# EAGLE board RelayBoard (EAGLE 4.13)
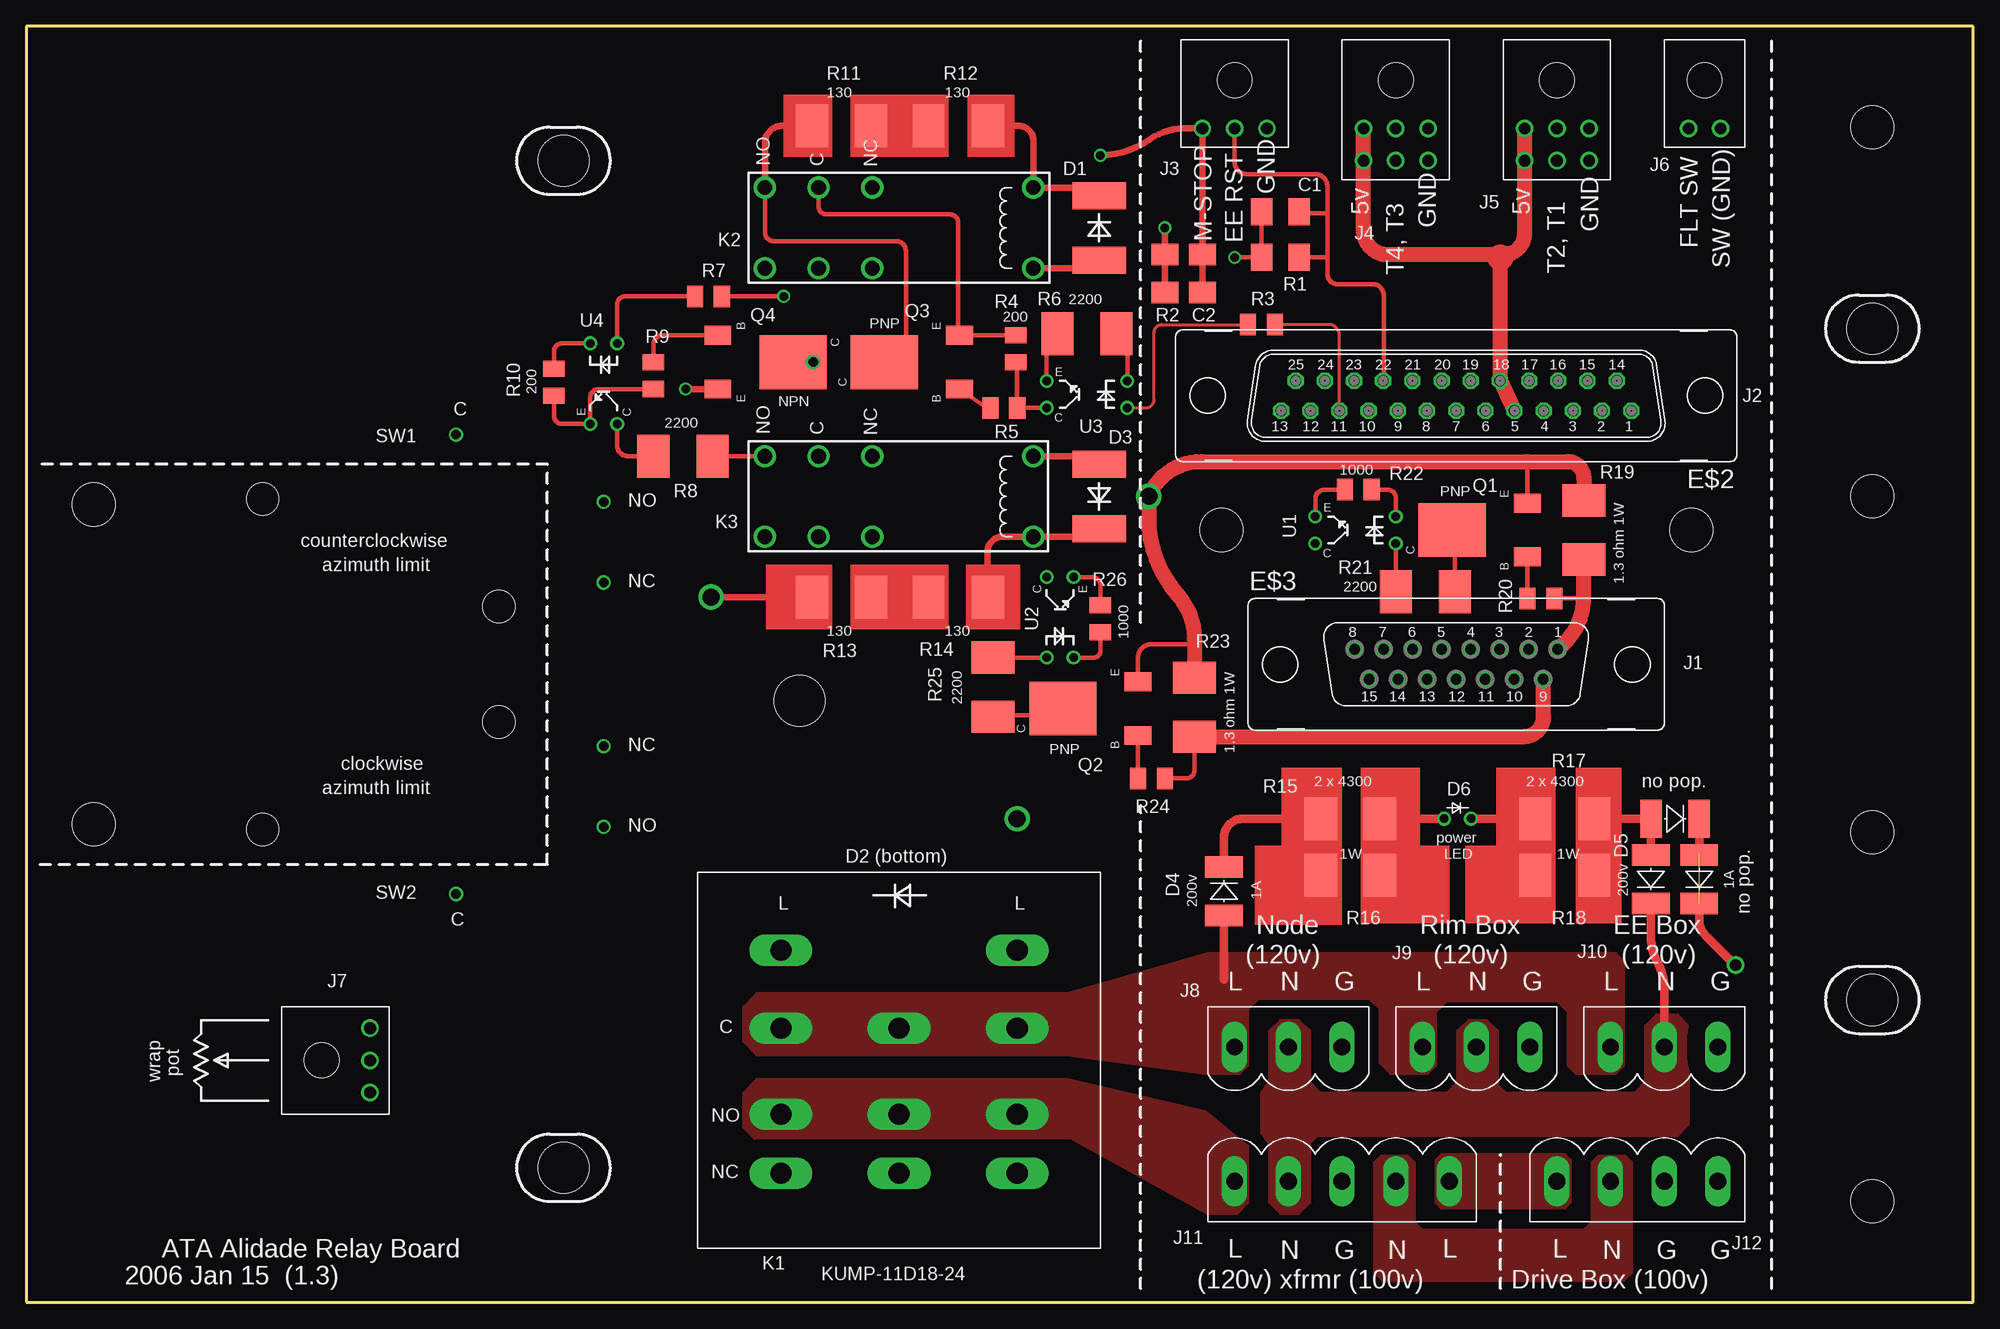
[diagram p0: board, top side]
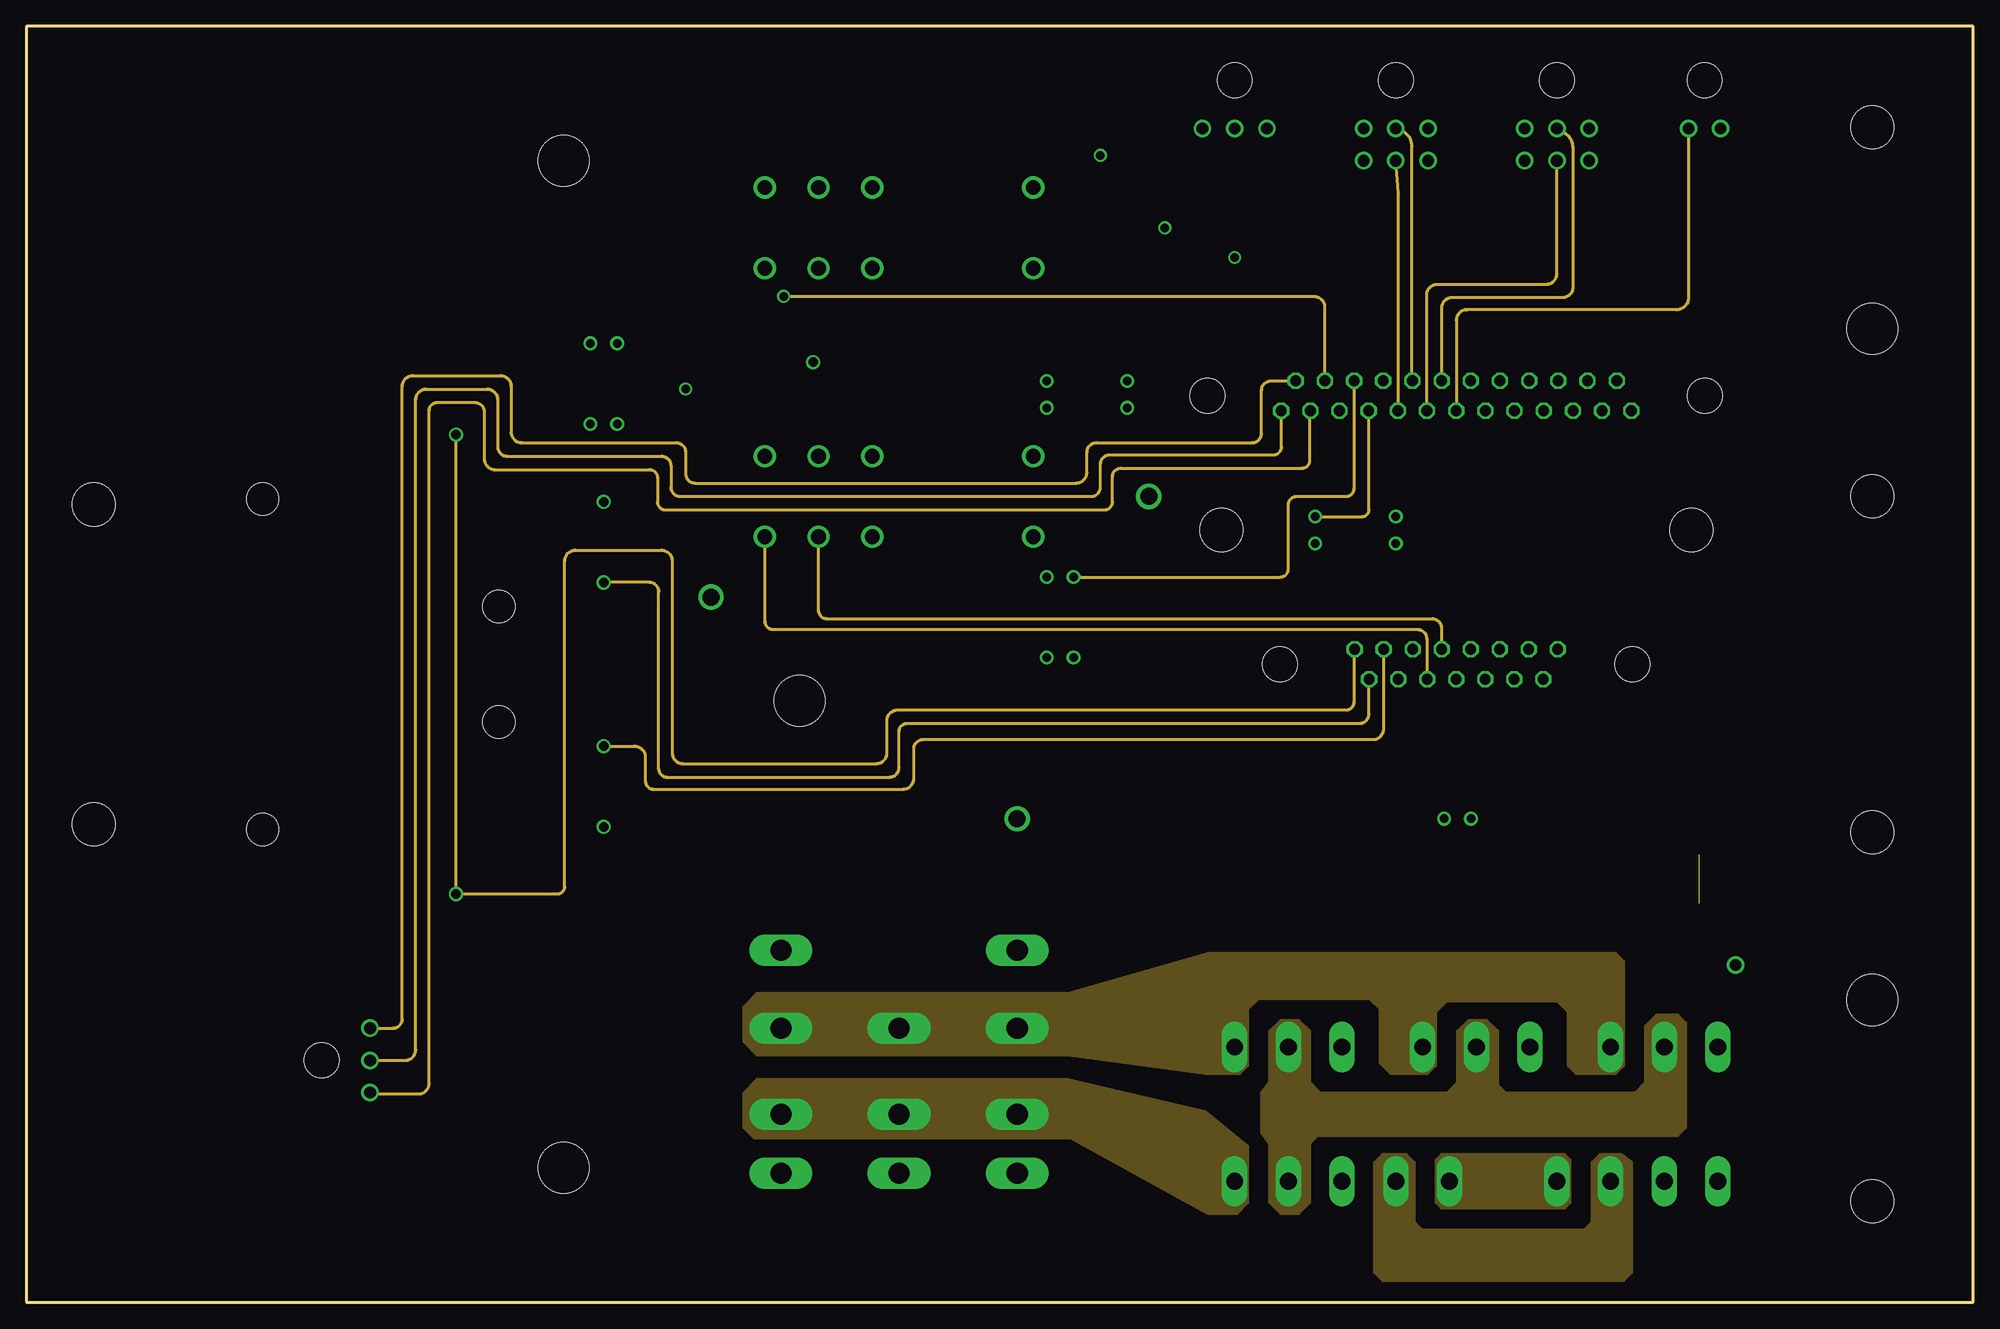
[diagram p1: board, inner layer Route2]
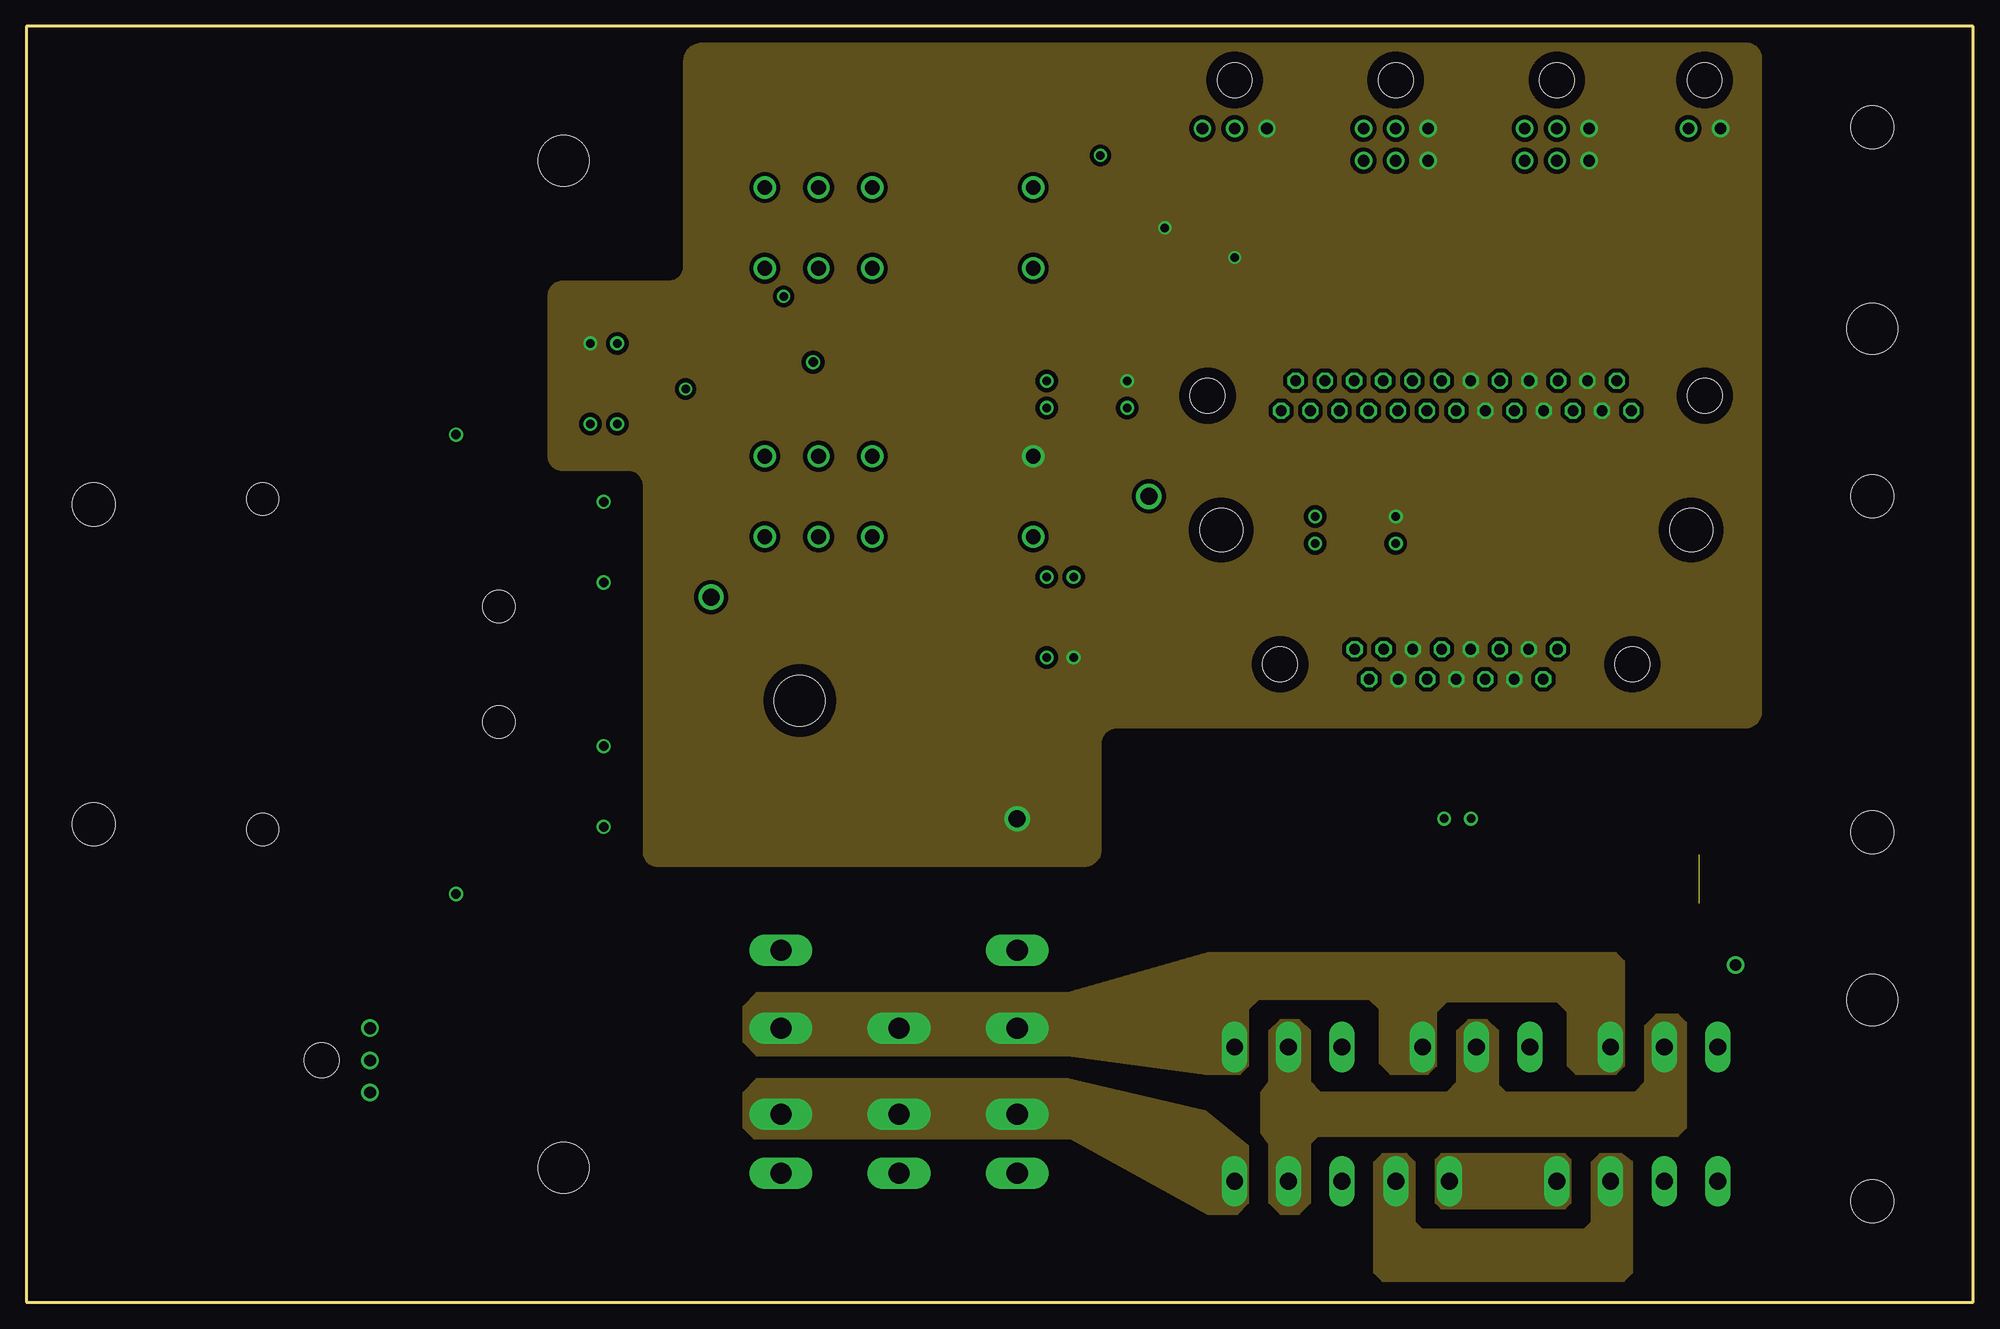
[diagram p2: board, inner layer Route15]
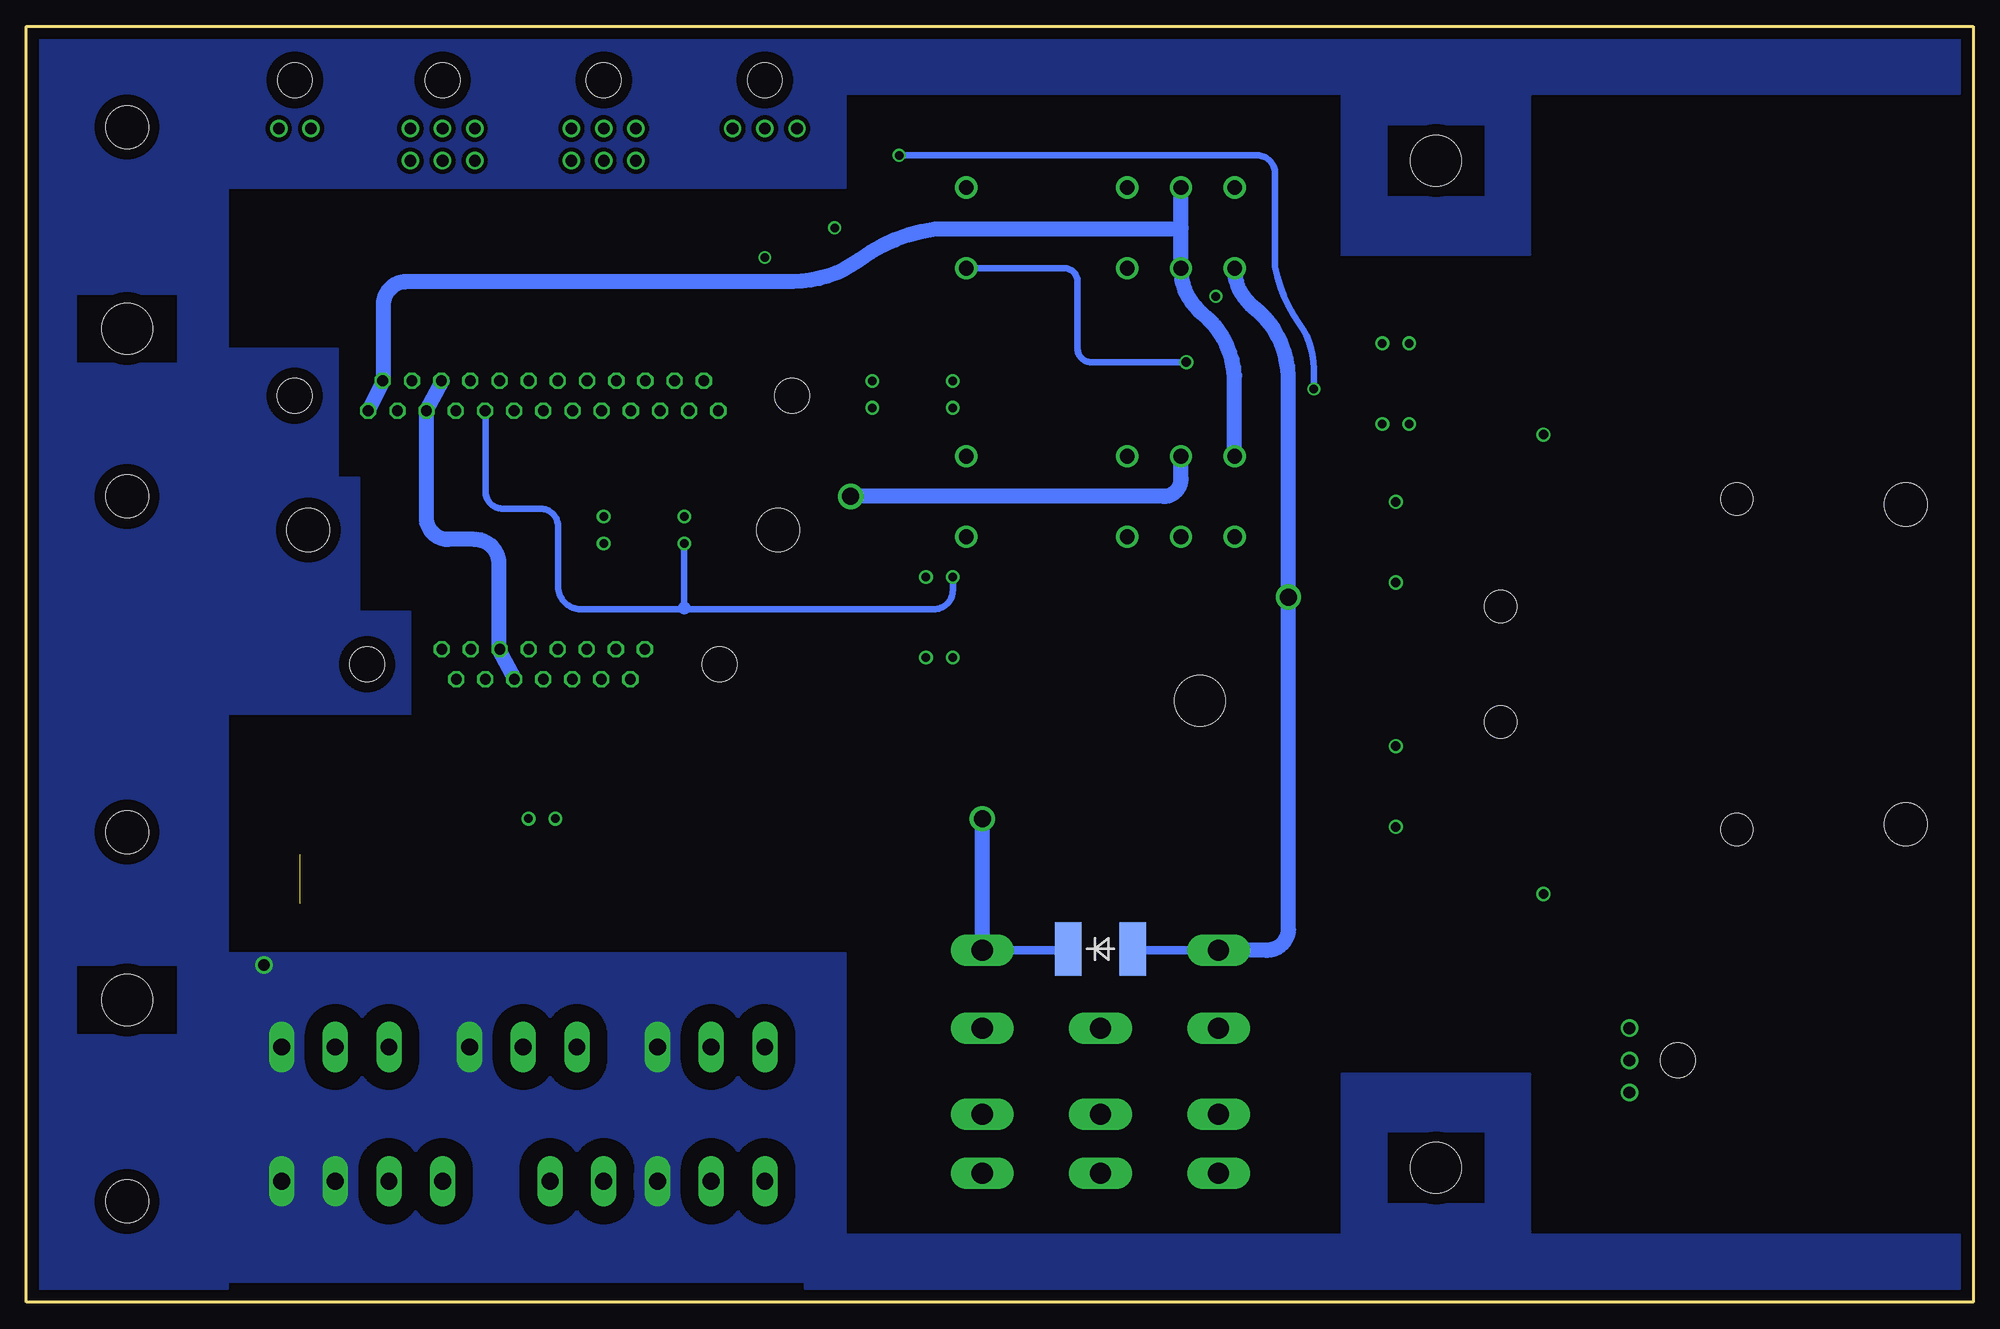
[diagram p3: board, bottom side, seen from below]

Size 184.15 x 120.65 mm. Coordinates in mm from the lower left corner, seen from the top.
Outline: 0,0 184.15,0 184.15,120.65 0,120.65 0,0
Copper layers (1*2+15*16): Top 0.035mm / dielectric 1.5mm / Route2 0.035mm / dielectric 0.15mm / Route15 0.035mm / dielectric 0.2mm / Bottom 0.035mm
Design rules "default": minimum track width 10mil, minimum drill 24mil, track to track 8mil, track to pad 8mil, pad to pad 8mil, via to via 8mil, smd to smd 8mil, copper to edge 40mil, drill to drill 8mil, minimum pad ring 10mil, minimum via ring 8mil, stop-mask expansion 4mil, vias tented up to drill 0mil, thermal gap 10mil
Holes 4.83 mm at 50.8,12.7 50.8,107.95 174.62,28.57 174.62,92.08 73.15,56.9
Holes 4.06 mm at 174.62,9.53 174.62,44.45 174.62,76.2 174.62,111.12 6.35,45.21 6.35,75.44 157.48,73.03 113.03,73.03
Holes 3.05 mm at 22.35,44.7 22.35,75.95 44.7,54.86 44.7,65.79
bRestrict: area 169.9,88.9 to 179.3,95.2; area 169.9,25.4 to 179.3,31.8; area 46.2,9.4 to 55.4,16; area 46.2,104.6 to 55.4,111.3

## Footprints (pad centres in the part's own frame; a part is rotated, then mirrored left to right if it is on the bottom)
POTTERBRUMFIELDRELAYSOCKET = drill 2 long: P$1 11.176,10.414; P$2 11.176,-10.668; P$3 -11.176,-10.668; P$4 -11.176,10.414; P$5 -11.176,-5.08; P$6 11.176,-5.08; P$7 0,-5.08; P$8 0,-10.668; P$9 -11.176,3.048; P$10 11.176,3.048; P$11 0,3.048
M25V = drill 1.016 octagon: 1 -16.561,1.422; 2 -13.792,1.422; 3 -11.049,1.422; 4 -8.28,1.422; 5 -5.512,1.422; 6 -2.769,1.422; 7 0,1.422; 8 2.769,1.422; 9 5.512,1.422; 10 8.28,1.422; 11 11.049,1.422; 12 13.792,1.422; 13 16.561,1.422; 14 -15.189,-1.422; 15 -12.421,-1.422; 16 -9.652,-1.422; 17 -6.909,-1.422; 18 -4.14,-1.422; 19 -1.372,-1.422; 20 1.372,-1.422; 21 4.14,-1.422; 22 6.909,-1.422; 23 9.652,-1.422; 24 12.421,-1.422; 25 15.189,-1.422 | hole 3.302: 23.52,0; -23.52,0
F15V = drill 1.016 octagon: 1 9.601,1.422; 2 6.858,1.422; 3 4.115,1.422; 4 1.372,1.422; 5 -1.372,1.422; 6 -4.115,1.422; 7 -6.858,1.422; 8 -9.601,1.422; 9 8.23,-1.422; 10 5.486,-1.422; 11 2.743,-1.422; 12 0,-1.422; 13 -2.743,-1.422; 14 -5.486,-1.422; 15 -8.23,-1.422 | hole 3.302: 16.662,0; -16.662,0
MOLEX398604PINHDR = drill 1.6 long: P$1 -2.54,0; P$2 -7.62,0; P$3 2.54,0; P$4 7.62,0
MOLEX398603PINHDR = drill 1.6 long: P$1 0,0; P$2 -5.08,0; P$3 5.08,0
MOLEX398605PINHDR = drill 1.6 long: P$1 0,0; P$2 -5.08,0; P$3 -10.16,0; P$4 5.08,0; P$5 10.16,0
MICROFIT1X3PIN = drill 1.1 round: P$1 0,4.572; P$2 -3.048,4.572; P$3 3.048,4.572 | hole 3.302: 0,0
MICROFIT1X2PIN = drill 1.1 round: P$1 1.524,4.572; P$2 -1.524,4.572 | hole 3.302: 0,0
MICROFIT2X3PIN = drill 1.1 round: P$1 0,4.572; P$2 -3.048,4.572; P$3 3.048,4.572; P$4 0,7.62; P$5 -3.048,7.62; P$6 3.048,7.62 | hole 3.302: 0,0
SILICONDIODESMA = smd 3.556 x 2.032: P$1 0,2.286; P$2 0,-2.286
RESISTOR1WSMD = smd 4.064 x 3.048: P$1 0,2.794; P$2 0,-2.794
LEDT134 = drill 0.8 round: P$1 -1.27,0; P$2 1.27,0
RELAY12VDPDT5A = drill 1.4 round: P$1 -3.81,12.7; P$2 3.81,12.7; P$3 -3.81,-2.54; P$4 -3.81,-7.62; P$5 -3.81,-12.7; P$6 3.81,-12.7; P$7 3.81,-7.62; P$8 3.81,-2.54
DPAK = smd 5.08 x 6.35: P$1 0,4.572 | smd 1.778 x 2.54: P$2 -2.54,-2.54; P$3 2.54,-2.54
SMD0805 = smd 2.032 x 1.524: P$1 0,1.27; P$2 0,-1.27
SMD1206 = smd 2.54 x 2.032: P$1 0,1.778; P$2 0,-1.778
OPTOISOLATOR4PIN = drill 0.8 round: P$1 -3.81,1.27; P$2 -3.81,-1.27; P$3 3.81,1.27; P$4 3.81,-1.27
SCHOTTKYDIODESMC = smd 5.08 x 2.54: P$1 0,3.048; P$2 0,-3.048

## Placement (x,y rotation side)
E$1  [POTTERBRUMFIELDRELAYSOCKET]  82.55,22.86 0 top
E$2  [M25V]  135.25,85.72 180 top
E$3  [F15V]  135.25,60.33 0 top
E$4  [MOLEX398604PINHDR]  152.4,11.43 0 top
E$5  [MOLEX398603PINHDR]  154.94,24.13 0 top
E$6  [MOLEX398603PINHDR]  137.16,24.13 0 top
E$7  [MOLEX398603PINHDR]  119.38,24.13 0 top
E$8  [MOLEX398605PINHDR]  124.46,11.43 0 top
E$9  [MICROFIT1X3PIN]  114.3,115.57 180 top
E$10  [MICROFIT1X3PIN]  27.94,22.86 270 top
E$11  [MICROFIT1X2PIN]  158.75,115.57 180 top
E$12  [MICROFIT2X3PIN]  129.54,115.57 180 top
E$13  [MICROFIT2X3PIN]  144.78,115.57 180 top
E$14  [SILICONDIODESMA]  153.67,40.01 0 top
E$15  [SILICONDIODESMA]  155.96,45.72 90 top
E$16  [RESISTOR1WSMD]  145.54,45.72 90 top
E$17  [RESISTOR1WSMD]  125.22,45.72 90 top
E$18  [SILICONDIODESMA]  113.28,38.86 180 top
E$19  [LEDT134]  135.38,45.72 0 top
E$20  [RELAY12VDPDT5A]  82.55,101.6 270 top
E$21  [RELAY12VDPDT5A]  82.55,76.2 270 top
E$22  [RESISTOR1WSMD]  147.32,73.03 0 top
E$23  [DPAK]  139.45,73.03 90 top
E$24  [SMD0805]  143.26,66.55 90 top
E$25  [RESISTOR1WSMD]  110.49,56.26 0 top
E$26  [DPAK]  102.62,56.13 90 top
E$27  [SMD0805]  106.43,49.53 90 top
E$28  [SMD1206]  118.62,103.12 90 top
E$29  [SMD1206]  118.62,98.81 90 top
E$30  [OPTOISOLATOR4PIN]  125.73,73.03 180 top
E$31  [RESISTOR1WSMD]  132.33,67.18 90 top
E$32  [OPTOISOLATOR4PIN]  97.79,64.77 90 top
E$33  [RESISTOR1WSMD]  91.44,58.17 0 top
E$34  [SMD0805]  125.98,76.83 90 top
E$35  [SMD0805]  101.6,64.64 0 top
E$36  [OPTOISOLATOR4PIN]  100.33,85.85 180 top
E$37  [OPTOISOLATOR4PIN]  54.61,86.87 270 top
E$38  [DPAK]  85.72,88.9 90 top
E$39  [DPAK]  67.94,88.9 270 top
E$40  [SCHOTTKYDIODESMC]  101.47,101.6 180 top
E$41  [SCHOTTKYDIODESMC]  101.47,76.2 0 top
E$42  [RESISTOR1WSMD]  88.14,111.25 90 top
E$43  [RESISTOR1WSMD]  77.09,111.25 90 top
E$44  [RESISTOR1WSMD]  77.09,66.67 90 top
E$45  [RESISTOR1WSMD]  88.14,66.67 90 top
E$46  [SCHOTTKYDIODESMC]  82.55,33.4 270 bottom
E$47  [RESISTOR1WSMD]  100.33,91.57 270 top
E$48  [SMD0805]  92.46,84.58 90 top
E$49  [SMD0805]  93.6,90.17 180 top
E$50  [SMD1206]  111.25,97.28 0 top
E$51  [SMD1206]  107.7,97.28 0 top
E$52  [SMD0805]  64.52,95.12 90 top
E$53  [SMD0805]  59.31,87.63 180 top
E$54  [SMD0805]  49.91,87 180 top
E$55  [RESISTOR1WSMD]  62.1,80.01 90 top
E$56  [SMD0805]  116.84,92.46 90 top
E$57  [RESISTOR1WSMD]  125.22,40.39 90 top
E$58  [RESISTOR1WSMD]  145.54,40.39 90 top
E$59  [SILICONDIODESMA]  158.24,40.01 0 top

## Library data of the parts
E$1 E$4-E$59 = rfa
E$2 E$3 = con-subd

## Nets
FRAME: E$4.P$3 E$4.P$4 E$5.P$3 E$6.P$3 E$7.P$3 E$8.P$1 E$15.P$2 E$59.P$1 E$59.P$2
GROUND: E$1.P$1 E$2.2 E$2.4 E$2.6 E$2.15 E$2.17 E$2.19 E$3.2 E$3.4 E$3.6 E$3.10 E$3.12 E$3.14 E$9.P$2 E$11.P$2 E$12.P$2 E$12.P$5 E$13.P$2 E$13.P$5 E$21.P$1 E$28.P$1 E$29.P$1 E$30.P$2 E$32.P$2 E$34.P$2 E$36.P$2 E$37.P$2 E$51.P$1 E$51.P$2
LDRIVE: E$4.P$2 E$8.P$5
LNODE: E$1.P$9 E$1.P$10 E$1.P$11 E$5.P$2 E$6.P$2 E$7.P$2 E$18.P$1
LXFRMR: E$1.P$5 E$1.P$6 E$1.P$7 E$8.P$3
NDRIVE: E$4.P$1 E$8.P$4
NNODE: E$5.P$1 E$6.P$1 E$7.P$1 E$8.P$2 E$14.P$2
S$4: E$10.P$3
S$13: E$16.P$1 E$19.P$2 E$58.P$1
S$14: E$17.P$2 E$19.P$1 E$57.P$2
S$15: E$20.P$4 E$20.P$7 E$21.P$5
S$16: E$17.P$1 E$18.P$2 E$57.P$1
S$17: E$11.P$1
S$18: E$12.P$3 E$12.P$6 E$13.P$3 E$13.P$6
S$20: E$13.P$4
S$22: E$12.P$4
S$23: E$22.P$2
S$24: E$9.P$1 E$29.P$2
S$26: E$23.P$2
S$27: E$24.P$2
S$29: E$53.P$2
S$30: E$20.P$6
S$31: E$26.P$2 E$27.P$1
S$32: E$27.P$2
S$33: E$32.P$1 E$33.P$1
S$34: E$30.P$1 E$31.P$1
S$35: E$31.P$2
S$36: E$30.P$3
S$37: E$21.P$4 E$22.P$1 E$23.P$3 E$26.P$3
S$38: E$56.P$2
S$39: E$30.P$4 E$34.P$1
S$41: E$9.P$3 E$39.P$3 E$50.P$2
S$42: E$32.P$4 E$35.P$1
S$43: E$20.P$5 E$43.P$1
S$44: E$42.P$1 E$43.P$2
S$45: E$20.P$1
S$46: E$44.P$2
S$47: E$21.P$2 E$45.P$2
S$49: E$20.P$2
S$50: E$36.P$4
S$51: E$15.P$1 E$16.P$2 E$58.P$2
S$52: E$1.P$4
S$54: E$36.P$3 E$48.P$2
S$55: E$38.P$2
S$56: E$38.P$3 E$49.P$2
S$58: E$21.P$6
S$59: E$21.P$7
S$61: E$10.P$1
S$64: E$37.P$1
S$66: E$37.P$3 E$55.P$1
S$69: E$37.P$4 E$53.P$1 E$54.P$1
S$71: E$36.P$1
S$73: E$52.P$2

## Tracks (layer width: path | path; a pad name or v marks a point on that pad's centre or on a via)
FRAME  (via drill 1.1)  (1 unrouted)
  Top 0.813: E$59.P$1 E$15.P$2 | E$59.P$2 158.24,36.13 arc45 158.83,34.72 v161.67,31.88
  pour Bottom (isolate 1.676, no thermals): 106.68,33.02 167.64,33.02 167.64,1.27 106.68,1.27
FRAMEEAST
  pour Bottom (no thermals): 165.1,119.38 182.88,119.38 182.88,1.27 165.1,1.27 165.1,64.52 152.65,64.52 152.65,77.98 165.1,77.98
GROUND  (via drill 0.8, 1.6)
  Top 0.406: E$30.P$2 129.54,76.07 arc90 128.78,76.83 E$34.P$2 | E$32.P$2 100.97,60.96 arc90 101.6,61.59 101.6,63.25 arc-90 101.73,63.37 | E$36.P$2 104.14,91.57 | E$37.P$2 50.67,90.68 arc90 49.91,89.92 49.91,88.27 arc-90 49.78,88.14 | E$28.P$1 E$29.P$1 v114.3,98.81
  Top 0.61: E$51.P$2 E$51.P$1 v107.7,101.6 | E$21.P$1 101.47,80.01
  Bottom 0.813: 85.6,33.27 E$1.P$1
  Bottom 1.422: E$1.P$1 v93.73,45.72
  pour Route15 (isolate 0.406, no thermals): 50.8,96.52 60.83,96.52 arc90 62.23,97.92 62.23,117.35 arc-90 63.88,119 162.69,119 arc-90 164.08,117.6 164.08,55.88 arc-90 162.56,54.36 103.12,54.36 arc90 101.6,52.83 101.6,42.8 arc-90 100.08,41.27 59.69,41.27 arc-90 58.42,42.55 58.42,77.22 arc90 56.9,78.74 50.67,78.74 arc-90 49.4,80.01 49.4,95.12 arc-90
LDRIVE
  pour Top (isolate 1.676, no thermals): 133.35,13.46 133.86,13.97 145.54,13.97 146.05,13.46 146.05,9.4 145.54,8.89 133.86,8.89 133.35,9.4
  pour Route2 (isolate 1.676, no thermals): 133.86,13.97 145.54,13.97 146.05,13.46 146.05,9.4 145.54,8.89 133.86,8.89 133.35,9.4 133.35,13.46
  pour Route15 (isolate 1.676, no thermals): 133.35,13.46 133.86,13.97 145.54,13.97 146.05,13.46 146.05,9.4 145.54,8.89 133.86,8.89 133.35,9.4
LNODE
  Top 0.813: 113.28,30.48 E$18.P$1
  pour Top (isolate 1.676, no thermals): 151.13,22.35 150.37,21.59 146.56,21.59 145.8,22.35 145.8,27.43 144.78,28.45 134.37,28.45 133.35,27.43 133.35,22.35 132.59,21.59 129.03,21.59 128.02,22.61 128.02,27.69 127,28.7 116.59,28.7 115.57,27.69 115.57,22.35 114.81,21.59 111.51,21.59 98.55,23.37 69.09,23.37 67.82,24.64 67.82,27.94 69.09,29.21 98.55,29.21 111.76,33.02 150.37,33.02 151.13,32.26
  pour Route2 (isolate 1.676, no thermals): 67.82,27.94 69.09,29.21 98.55,29.21 111.76,33.02 150.37,33.02 151.13,32.26 151.13,22.35 150.37,21.59 146.56,21.59 145.8,22.35 145.8,27.43 144.78,28.45 134.37,28.45 133.35,27.43 133.35,22.35 132.59,21.59 129.03,21.59 128.02,22.61 128.02,27.69 127,28.7 116.59,28.7 115.57,27.69 115.57,22.35 114.81,21.59 111.51,21.59 98.55,23.37 69.09,23.37 67.82,24.64
  pour Route15 (isolate 1.676, no thermals): 69.09,29.21 98.55,29.21 111.76,33.02 150.37,33.02 151.13,32.26 151.13,22.35 150.37,21.59 146.56,21.59 145.8,22.35 145.8,27.43 144.78,28.45 134.37,28.45 133.35,27.43 133.35,22.35 132.59,21.59 129.03,21.59 128.02,22.61 128.02,27.69 127,28.7 116.59,28.7 115.57,27.69 115.57,22.35 114.81,21.59 111.51,21.59 98.55,23.37 69.09,23.37 67.82,24.64 67.82,27.94
LXFRMR
  pour Top (isolate 1.676, no thermals): 69.09,21.08 98.55,21.08 111.51,18.03 115.57,14.73 115.57,9.4 114.55,8.38 111.76,8.38 98.81,15.49 68.83,15.49 67.82,16.51 67.82,19.81
  pour Route2 (isolate 1.676, no thermals): 69.09,21.08 98.55,21.08 111.51,18.03 115.57,14.73 115.57,9.4 114.55,8.38 111.76,8.38 98.81,15.49 68.83,15.49 67.82,16.51 67.82,19.81
  pour Route15 (isolate 1.676, no thermals): 69.09,21.08 98.55,21.08 111.51,18.03 115.57,14.73 115.57,9.4 114.55,8.38 111.76,8.38 98.81,15.49 68.83,15.49 67.82,16.51 67.82,19.81
NDRIVE
  pour Top (isolate 1.676, rank 2, no thermals): 127.51,13.21 128.52,14.22 130.3,14.22 131.32,13.21 131.32,7.62 132.08,6.86 147.32,6.86 148.08,7.62 148.08,13.21 149.1,14.22 150.88,14.22 151.89,13.21 151.89,2.79 151.13,2.03 128.27,2.03 127.51,2.79
  pour Route2 (isolate 1.676, no thermals): 127.51,13.21 128.27,13.97 130.56,13.97 131.32,13.21 131.32,7.62 132.08,6.86 147.32,6.86 148.08,7.62 148.08,13.21 148.84,13.97 150.88,13.97 151.89,13.21 151.89,2.79 151.13,2.03 128.27,2.03 127.51,2.79
  pour Route15 (isolate 1.676, no thermals): 128.27,13.97 130.56,13.97 131.32,13.21 131.32,7.62 132.08,6.86 147.32,6.86 148.08,7.62 148.08,13.21 148.84,13.97 150.88,13.97 151.89,13.21 151.89,2.79 151.13,2.03 128.27,2.03 127.51,2.79 127.51,13.21
NNODE
  Top 0.813: E$14.P$2 153.67,34.67 arc28 154.31,32.13 arc-29 154.94,29.46 E$5.P$1
  pour Top (isolate 1.676, no thermals): 117.6,25.65 118.62,26.67 120.4,26.67 121.41,25.65 121.41,20.83 122.43,19.81 134.37,19.81 135.38,20.83 135.38,25.65 136.4,26.67 138.18,26.67 139.19,25.65 139.19,20.57 139.95,19.81 152.15,19.81 153.16,20.83 153.16,26.16 154.18,27.18 156.21,27.18 157.23,26.16 157.23,16.76 156.21,15.75 122.17,15.75 121.41,14.99 121.41,9.4 120.4,8.38 118.62,8.38 117.6,9.4 117.6,14.99 116.84,16 116.84,19.81 117.6,20.83
  pour Route2 (isolate 1.676, no thermals): 118.62,26.67 120.4,26.67 121.41,25.65 121.41,20.83 122.43,19.81 134.37,19.81 135.38,20.83 135.38,25.65 136.4,26.67 138.18,26.67 139.19,25.65 139.19,20.57 139.95,19.81 152.15,19.81 153.16,20.83 153.16,26.16 154.18,27.18 156.21,27.18 156.97,26.42 156.97,16.51 156.21,15.75 122.17,15.75 121.41,14.99 121.41,9.4 120.4,8.38 118.62,8.38 117.6,9.4 117.6,14.99 116.84,16 116.84,19.81 117.6,20.83 117.6,25.65
  pour Route15 (isolate 1.676, no thermals): 117.6,25.65 118.62,26.67 120.4,26.67 121.41,25.65 121.41,20.83 122.43,19.81 134.37,19.81 135.38,20.83 135.38,25.65 136.4,26.67 138.18,26.67 139.19,25.65 139.19,20.57 139.95,19.81 152.15,19.81 153.16,20.83 153.16,26.16 154.18,27.18 156.21,27.18 156.97,26.42 156.97,16.51 156.21,15.75 122.17,15.75 121.41,14.99 121.41,9.4 120.4,8.38 118.62,8.38 117.6,9.4 117.6,14.99 116.84,16 116.84,19.81 117.6,20.83
S$1
  Bottom 1.422: 137.92,58.93 139.45,61.72 139.45,69.85 arc-90 141.73,72.14 144.27,72.14 arc90 146.3,74.17 146.3,84.33 144.78,87.12
S$2  (via drill 0.9)
  other vias: 54.61,75.69
S$3  (via drill 0.9)
  Route2 0.305: 125.6,61.72 125.6,56.77 arc-90 124.84,56.01 82.42,56.01 arc90 81.41,54.99 81.41,51.94 arc-90 80.39,50.93 62.1,50.93 arc-90 61.09,51.94 61.09,70.1 arc90 60.07,71.12 51.94,71.12 arc90 50.93,70.1 50.93,39.31 arc-90 50.23,38.61 v40.64,38.61 v40.64,82.04
S$4
  Route2 0.305: 121.41,84.33 121.41,79.63 arc-90 120.65,78.87 103.5,78.87 arc90 102.74,78.11 102.74,75.69 arc-90 101.98,74.93 60.45,74.93 arc-90 59.69,75.69 59.69,77.98 arc90 58.93,78.74 44.32,78.74 arc-90 43.31,79.76 43.31,84.2 arc90 42.42,85.09 38.86,85.09 arc90 38.1,84.33 38.1,20.7 arc-90 37.08,19.68 32.64,19.68 arc-90 E$10.P$3
S$5  (via drill 0.9)
  Route2 0.305: v54.61,52.58 57.53,52.58 arc-90 58.55,51.56 58.55,49.28 arc90 59.31,48.51 82.93,48.51 arc90 83.95,49.53 83.95,52.32 arc-90 84.84,53.21 127.38,53.21 arc90 128.4,54.23 128.4,61.85
S$6  (via drill 0.9)
  other vias: 54.61,44.96
S$7
  pour Bottom (no thermals): 1.27,119.38 107.95,119.38 107.95,114.3 59.69,114.3 59.69,99.06 41.91,99.06 41.91,114.3 1.27,114.3
S$8
  pour Bottom (isolate 0.406, no thermals): 106.68,119.38 166.37,119.38 166.37,105.41 106.68,105.41
S$9
  pour Bottom (no thermals): 154.69,90.17 166.37,90.17 166.37,76.45 154.69,76.45
S$10
  pour Bottom (no thermals): 147.83,65.28 167.39,65.28 167.39,55.63 147.83,55.63
S$11
  pour Bottom (no thermals): 1.27,6.35 41.91,6.35 41.91,21.59 59.69,21.59 59.69,6.35 110.49,6.35 110.49,1.27 1.27,1.27
S$13
  Top 0.813: E$16.P$1 E$19.P$2
  Top 2.54: E$58.P$1 E$16.P$1
S$14
  Top 0.813: E$17.P$2 E$19.P$1
  Top 2.54: E$57.P$2 E$17.P$2
S$15
  Top 0.406: E$20.P$4 74.93,103.63 arc90 75.69,102.87 87.38,102.87 arc-90 88.14,102.11 88.14,91.44 | 65.15,80.01 E$21.P$5
  Bottom 1.422: 148.34,96.52 111.63,96.52 arc-36 105.41,98.55 arc28 98.17,101.47 75.06,101.47 arc-90 74.93,101.6 | 74.93,101.6 E$20.P$4 | 74.93,101.6 E$20.P$7 arc-50 72.9,93.47 arc46 69.85,87.63 E$21.P$5
S$16
  Top 0.813: E$18.P$2 113.28,43.94 arc-90 115.06,45.72 E$17.P$1
  Top 2.54: E$17.P$1 E$57.P$1
S$17
  Route2 0.305: 135.25,84.33 135.25,92.84 arc-90 136.27,93.85 156.08,93.85 arc90 157.23,95 E$11.P$1
S$18
  Top 1.422: 140.72,84.33 139.45,87.12 139.45,99.06 | E$12.P$3 E$12.P$6 126.49,101.35 arc90 128.78,99.06 139.45,99.06 | 139.45,99.06 139.7,99.06 arc90 141.73,101.09 E$13.P$6 E$13.P$3
S$19
  Route2 0.305: 133.86,87.12 133.86,93.98 arc-90 134.87,95 145.29,95 arc90 146.3,96.01 146.3,109.22 arc90 144.78,110.74
S$20
  Route2 0.305: 132.46,84.33 132.46,95.25 arc-90 133.48,96.27 143.76,96.27 arc90 144.78,97.28 E$13.P$4
S$21
  Route2 0.305: 131.06,87.12 131.06,109.35 arc90 129.54,110.87
S$22
  Route2 0.305: 129.79,84.33 129.79,104.9 E$12.P$4
S$23
  Top 1.422: E$22.P$2 147.32,66.67 arc-54 144.78,61.72
S$24
  Top 0.406: 128.4,87.12 128.4,95.25 arc90 127.38,96.27 124.08,96.27 arc-90 123.06,97.28 123.06,98.81 | 123.06,98.81 123.06,103 | 123.06,103 123.06,105.54 arc90 121.92,106.68 115.44,106.68 arc-90 114.3,107.82 E$9.P$1 | 123.06,103 120.4,103 | 123.06,98.81 E$29.P$2
S$25
  Top 0.406: 91.44,55.5 97.79,55.5 arc-90 97.92,55.37
S$26
  Top 0.406: 141.99,65.91 E$23.P$2
S$27
  Top 0.406: E$24.P$2 147.57,66.55
S$28
  Top 1.422: 143.51,58.93 143.51,55.37 arc-90 141.6,53.47 110.36,53.47
S$29
  Top 0.406: E$53.P$2 59.31,90.55 arc-90 60.2,91.44 65.28,91.44
S$30
  Bottom 1.422: E$20.P$6 arc-52 68.07,94.11 arc48 64.77,87.76 64.77,35.31 arc90 66.8,33.27 71.25,33.27 arc-90 71.37,33.15
S$31
  Top 0.406: E$27.P$1 E$26.P$2
S$32
  Top 0.406: E$27.P$2 109.73,49.53 arc90 110.49,50.29 110.49,53.59
S$33
  Top 0.406: E$33.P$1 E$32.P$1
S$34
  Top 0.406: E$31.P$1 E$30.P$1
S$35
  Top 0.406: E$31.P$2 135.13,72.39
S$36
  Bottom 0.61: 140.72,84.33 140.72,76.71 arc-90 139.19,75.06 135.64,75.06 arc90 133.86,73.41 133.86,67.69 arc-90 131.7,65.53 121.92,65.53 | 121.92,65.53 98.3,65.53 arc-90 96.52,67.31 96.52,68.71 | 121.92,65.53 E$30.P$3
S$37  (via drill 1.6)
  Top 0.406: E$26.P$3 105.16,60.96 arc-90 106.43,62.23 110.49,62.23 | 141.99,79.5 E$23.P$3
  Top 1.422: 110.49,59.18 110.49,62.23 110.49,62.74 arc41 108.97,66.8 arc-35 106.17,73.15 v106.17,76.2 arc-67 111.12,79.5 141.99,79.5 145.8,79.5 arc-90 147.32,77.98 E$22.P$1
  Bottom 1.422: v106.17,76.2 76.58,76.2 arc-90 74.93,77.85 E$21.P$4
S$38
  Top 0.305: E$56.P$2 123.19,92.46 arc-90 124.21,91.44 124.21,84.33
S$39
  Top 0.406: E$30.P$4 121.92,75.95 arc-90 122.81,76.83 E$34.P$1
  Route2 0.305: 127,84.33 127,74.93 arc-90 126.36,74.3 E$30.P$4
S$40
  Bottom 1.422: 148.21,96.52 arc-90 150.37,94.36 150.37,87.12 151.76,84.33
S$41  (via drill 0.8)
  Top 0.61: E$50.P$2 E$9.P$3 109.47,111 arc35 106.3,109.98 arc-35 v101.6,108.46 | v62.36,86.36 E$39.P$3
  Bottom 0.61: v101.6,108.46 67.56,108.46 arc90 66.04,106.55 66.04,97.92 arc-25 63.75,92.58 arc36 62.36,88.27 v62.36,86.36
S$42
  Top 0.406: E$32.P$4 100.84,68.58 arc-90 101.6,67.82 E$35.P$1
  Route2 0.305: 125.6,87.12 125.6,76.96 arc-90 124.84,76.2 120.14,76.2 arc90 119.38,75.44 119.38,69.34 arc-90 118.62,68.58 E$32.P$4
S$43
  Top 0.406: E$20.P$5 69.85,101.22 arc90 70.74,100.33 82.3,100.33 arc-90 83.19,99.44 83.19,88.9
  Top 0.61: E$20.P$5 69.85,109.6 arc-90 71.5,111.25 E$43.P$1
S$44
  Top 0.61: E$43.P$2 E$42.P$1
S$45
  Top 0.61: 90.81,111.25 93.85,111.25 arc-90 95.25,109.86 E$20.P$1 101.35,105.41 arc-90 101.6,105.16 101.6,105.28
S$46
  Top 0.61: E$44.P$2 85.47,66.67
S$47
  Top 0.61: E$45.P$2 90.93,70.99 arc-90 92.33,72.39 E$21.P$2 101.47,72.39 arc90 101.6,72.52
S$49  (via drill 0.9)
  Top 0.61: E$20.P$2 101.09,97.79 arc90 101.35,98.04
  Bottom 0.61: E$20.P$2 85.98,97.79 arc90 84.71,96.52 84.71,90.17 arc-90 83.44,88.9 v74.42,88.9
S$50
  Top 0.406: E$36.P$4 96.52,91.57
S$51
  Top 0.813: E$16.P$2 E$15.P$1 153.67,42.42
  Top 2.54: E$58.P$2 E$16.P$2
S$52
  Bottom 0.813: E$1.P$4 79.63,33.27
S$54
  Top 0.406: E$36.P$3 E$48.P$2 93.73,88.9
S$55
  Top 0.406: E$38.P$2 91.06,84.45
S$56
  Top 0.406: E$38.P$3 E$49.P$2
S$58
  Route2 0.305: 132.46,58.93 132.46,62.74 arc90 131.57,63.63 70.61,63.63 arc-90 69.85,64.39 E$21.P$6
S$59
  Route2 0.305: 133.86,61.72 133.86,63.75 arc90 132.97,64.64 75.69,64.64 arc-90 74.93,65.41 E$21.P$7
S$60  (via drill 0.9)
  Route2 0.305: 127,58.93 127,55.63 arc-90 126.11,54.74 83.31,54.74 arc90 82.55,53.98 82.55,50.55 arc-90 81.66,49.66 60.58,49.66 arc-90 59.82,50.42 59.82,67.18 arc90 58.93,68.07 v54.61,68.07
S$61
  Route2 0.305: 118.75,84.33 118.75,80.9 arc-90 117.98,80.14 102.49,80.14 arc90 101.6,79.25 101.6,77.09 arc-90 100.71,76.2 61.85,76.2 arc-90 60.96,77.09 60.96,79.12 arc90 60.07,80.01 45.47,80.01 arc-90 44.58,80.9 44.58,85.34 arc90 43.56,86.36 37.85,86.36 arc90 36.83,85.34 36.83,23.88 arc-90 35.81,22.86 E$10.P$1
S$62
  Route2 0.305: 120.02,87.12 117.73,87.12 arc90 116.84,86.23 116.84,82.17 arc-90 115.95,81.28 101.22,81.28 arc90 100.33,80.39 100.33,78.49 arc-90 99.31,77.47 63.25,77.47 arc-90 62.36,78.36 62.36,80.39 arc90 61.47,81.28 46.86,81.28 arc-90 45.85,82.3 45.85,86.61 arc90 44.83,87.63 36.58,87.63 arc90 35.56,86.61 35.56,26.8 arc-90 34.67,25.91 32.38,25.91
S$64
  Top 0.406: E$37.P$1 55.88,94.36 arc-90 56.64,95.12 63.12,95.12
S$66
  Top 0.406: E$37.P$3 55.88,81.03 arc90 56.9,80.01 E$55.P$1
S$69
  Top 0.406: E$54.P$1 49.91,83.82 arc90 50.67,83.06 E$37.P$4 53.34,85.6 arc-90 54.1,86.36 E$53.P$1
S$71
  Top 0.305: E$36.P$1 105.92,84.58 arc90 106.68,85.34 106.68,91.69 arc-90 107.44,92.46 115.57,92.46
S$73  (via drill 0.8)
  Top 0.406: E$52.P$2 v71.63,95.12
  Route2 0.305: v71.63,95.12 121.79,95.12 arc-90 122.81,94.11 122.81,87.12
S$74  (via drill 1.6)
  Top 0.61: 74.55,66.55 arc90 74.42,66.67 v64.77,66.67
(copper drawn outside any net)
  shapes: Bottom circle x1, Top area x13, Top circle x1

## Text on the board
tPlace: R11 | R12 | 130 | 130 | D1 | J3 | J6 | GND | C1 | 5v | J5 | 5v | GND | GND | K2 | M-STOP | EE RST | J4 | FLT SW | SW (GND) | R7 | T4, T3 | T2, T1 | R1 | R4 | R6 | 2200 | R3 | Q4 | Q3 | 200 | R2 | C2 | U4 | PNP | R9 | R10 | 200 | NPN | J2 | C | 2200 | R5 | U3 | SW1 | D3 | 1000 | R22 | R19 | Q1 | R8 | PNP | NO | K3 | U1 | counterclockwise | azimuth limit | R21 | NC | R26 | 2200 | 1.3 ohm 1W | R20 | U2 | 130 | 130 | 1000 | R23 | R13 | R14 | J1 | R25 | 2200 | NC | PNP | 1.3 ohm 1W | R17 | clockwise | Q2 | 2 x 4300 | 2 x 4300 | no pop. | azimuth limit | R15 | D6 | R24 | NO | power | D2 (bottom) | 1W | LED | 1W | D5 | 1A | SW2 | D4 | 1A | 200v | 200v | no pop. | C | R16 | R18 | Node | Rim Box | EE Box | J10 | (120v) | J9 | (120v) | (120v) | J7 | J8 | L | N | G | L | N | G | L | N | G | wrap | pot | ATA Alidade Relay Board | J11 | J12 | L | N | G | N | L | L | N | G | G | K1 | 2006 Jan 15 (1.3) | KUMP-11D18-24 | (120v) xfrmr (100v) | Drive Box (100v)